# Altium PCB T35_V2.1.PcbDoc (part 3 of 5)
Units mil, origin at the board's own origin, x right, y up, seen from the top; angles counter-clockwise.
Board outline 2372.44 x 1023.62 mil, 12 copper layers (TOP, L2-G, L3, L4-G, L5, L6-V, L7-V, L8, L9-G, L10, L11-G, BOTTOM), stack 62.192 mil thick; 356 components, 288 nets, 1478 pads, 832 vias.
Unrouted connection lines stored in the file: 19.
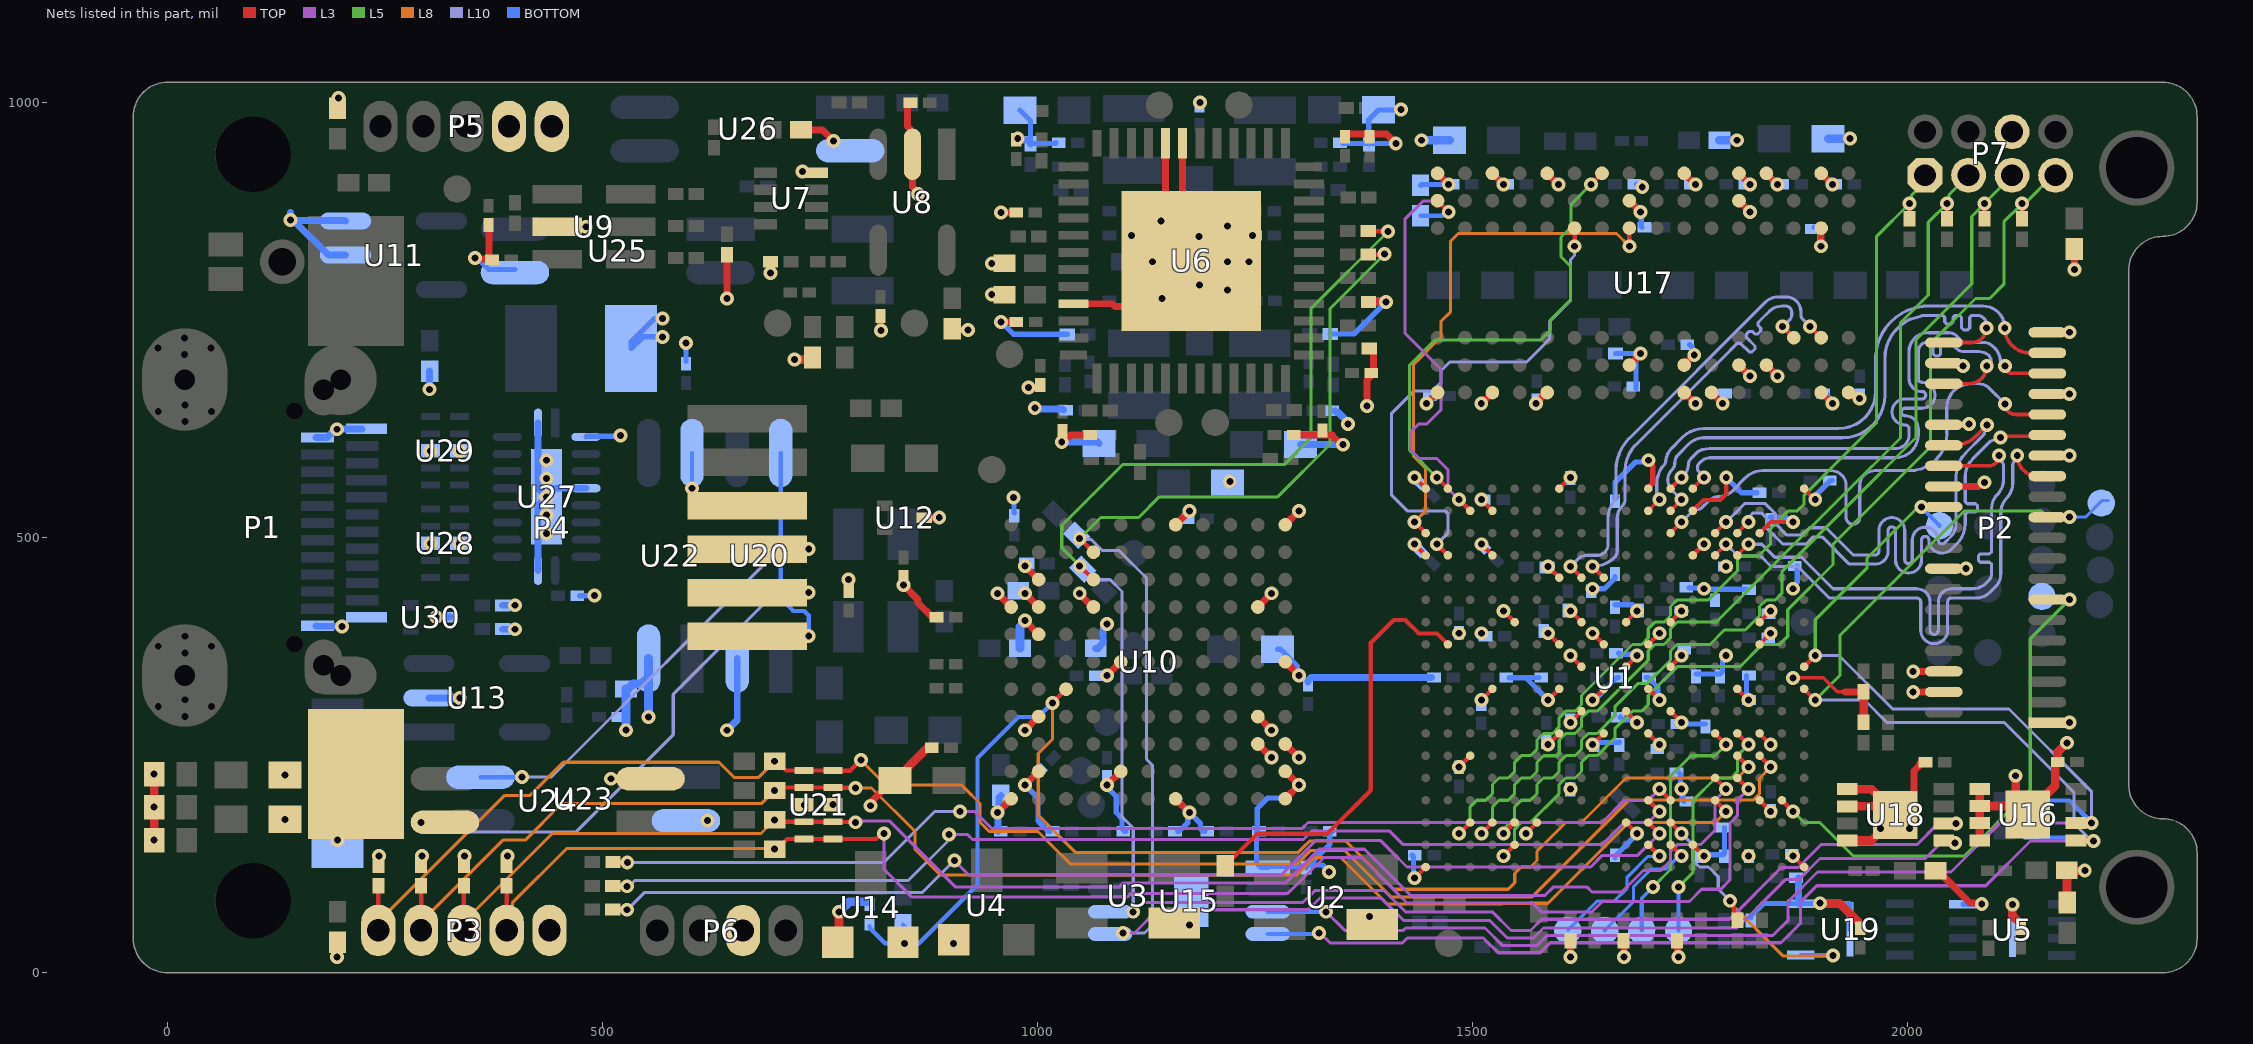
[diagram p13: the nets of this part, all layers, seen from the top]

## Via types
v1: diameter 16, hole 8, TOP to BOTTOM, tented both sides, 832 vias

## Nets (pads, with @x,y where several pads share a name; then routed paths per layer and width w, separated by ;. In a path a pad name is that pad's centre, name@x,y a point inside that pad or via, vN(x,y) a via of type N, cw(c..) or ccw(c..) an arc to the next point about the centre after c; other vN are vias at no path point) (continued)
DDR_DQS1_N: U1.L5 U17.B7 | length 523
  TOP w5: v1(1612.66,467.02) U1.L5@1625.46,454.23 ; v1(1888.18,742.81) U17.B7@1900.98,730.02
  L10 w3.6: v1(1612.66,467.02) 1621.14,475.5 cw(c1632,464.64) 1632,480 1644.76,480 ccw(c1644.76,490.24) 1652,483 ccw(c1642.43,492.57) 1655.97,492.57 1655.97,522.48 cw(c1686.49,522.48) 1663.32,542.35 ; 1658.61,534.91 ccw(c1655.48,536.7) 1658.75,535.17 cw(c1686.68,522.4) 1663.21,542.22 ccw(c1660.45,544.52) 1663.32,542.35 ; 1680.01,614.01 ccw(c1716.32,577.74) 1665,577.74 1665,550.34 cw(c1643.19,550.34) 1663.85,543.36 cw(c1660.45,544.52) 1663.32,542.35 ; 1680.03,614.03 1836.79,770.79 cw(c1851.63,755.95) 1851.63,776.94 1860.32,776.94 cw(c1860.32,759.53) 1877.73,759.53 1877.73,755.95 ccw(c1884.23,755.95) 1879.63,751.37 v1(1888.18,742.81)
DDR_DQS1_P: U1.K5 U17.C7 | length 514.2
  TOP w5: v1(1638.25,467.02) U1.K5@1651.05,454.23 ; v1(1856.68,742.81) U17.C7@1869.48,730.02
  L10 w3.6: v1(1638.25,467.02) ccw(c1638.25,502.69) 1663.42,477.42 ccw(c1638.25,502.69) 1663.47,477.47 ccw(c1656,484.94) 1666.57,484.94 1666.57,522.4 cw(c1686.68,522.4) 1672.46,536.63 1672.52,536.69 ccw(c1665.07,544.13) 1675.6,544.13 1675.6,577.74 cw(c1716.32,577.74) 1687.53,606.54 1795.73,714.74 1796.64,715.65 1804.7,723.71 1808.09,723.71 1818.13,713.67 1821.53,713.67 1824.92,717.06 1824.92,720.46 1814.88,730.5 1814.88,733.89 1818.28,737.28 1821.67,737.28 1824.71,734.25 1828.1,734.25 1831.49,737.64 1831.49,741.04 1828.46,744.07 1828.46,747.47 1831.88,750.89 1841.18,760.19 cw(c1856.02,745.35) 1856.02,766.34 1860.32,766.34 cw(c1860.32,759.53) 1867.13,759.53 1867.13,755.95 cw(c1860.63,755.95) 1865.23,751.36 v1(1856.68,742.81)
DDR_ODT: U1.U1 U17.K1 | length 552.3
  TOP w5: v1(1459.12,569.39) U1.U1@1471.91,556.59 ; v1(1636.21,906.2) U17.K1@1649.01,918.99
  L5 w3.5: v1(1459.12,569.39) 1428,600.5 1428,698.58 1456.84,727.43 1578.69,727.43 1589.38,738.11 1589.38,750 1612.66,773.28 1612.66,812.34 1602,823 1602,845.8 1613.56,857.36 1613.56,883.55 v1(1636.21,906.2)
DDR_R\A\S\: U1.V3 U17.J3 | length 605.9
  TOP w5: v1(1433.53,518.21) U1.V3@1446.32,505.41 ; v1(1680.5,835.13) U17.J3@1680.5,856
  L8 w3.5: v1(1433.53,518.21) 1446.28,530.96 1446.28,579.63 1432.49,593.42 1432.49,603.4 1432.49,699.49 1463.98,730.98 1463.98,748.92 1475,759.94 1475,811 ; 1474.78,811 1474.78,841 1483.66,849.88 1665.75,849.88 v1(1680.5,835.13)
DDR_REFCLK: R2.2 U1.U8 | length 484.7
  TOP w5: R2.2@1216,123 1216,125.5 1223.5,133 1226,133 1252.94,159.94 1333.56,159.94 1383.39,209.77 1383.39,379.44 1409.54,405.59 1422.94,405.59 1438.53,390 1459.37,390 U1.U8@1471.37,378
DDR_RST: R81.1 U1.T2 U17.T2 | length 529
  TOP w5: U17.T2@1460.03,887.5 v1(1472.83,874.7) ; v1(1484.71,543.8) U1.T2@1497.5,531
  L3 w3.5: v1(1472.83,874.7) 1460.53,887 1443.2,887 1422.44,866.24 1422.44,735.4 1463.98,693.86 1463.98,647.21 1447.76,630.99 1438.75,630.99 1429,621.24 1429,601.07 1438.84,591.23 1459.12,591.23 1471.87,578.48 1471.87,556.64 v1(1484.71,543.8)
  BOTTOM w5: R81.1@1440.37,870.2 1465.35,870.2 1469.85,874.7 v1(1472.83,874.7)
DDR_W\E\: U1.U4 U17.L3 | length 590.1
  TOP w5: v1(1459.12,492.61) U1.U4@1471.91,479.82 ; v1(1617.51,835.13) U17.L3@1617.51,856
  L10 w3.5: v1(1459.12,492.61) 1471.87,505.36 1471.87,527.91 1468.73,531.05 1425.14,531.05 1407.29,548.89 1407.29,643.15 1433.12,668.98 1454.15,668.98 1463.98,678.81 1463.98,691.83 1474.12,701.97 1562.37,701.97 1588.99,728.59 1588.99,748.7 1612.71,772.41 1612.71,819.66 1617.51,824.47 v1(1617.51,835.13)
FLASH_CS: R84.1 U1.G16 U19.1 | length 324.6
  TOP w5: U1.G16@1727.82,172.73 v1(1740.61,159.94) ; 1800.35,75.66 1800.35,64.88 R84.1@1804.74,60.49
  L8 w3.5: v1@1795.02,81.54 1857.46,19.11 1913.83,19.11 v1(1914.53,19.81)
  L10 w3.5: v1(1740.61,159.94) 1753.36,147.19 1753.36,129.16 1761.02,121.51 1771.49,121.51 1782.66,110.33 1782.66,96.32 v1(1796.23,82.75)
  BOTTOM w5: U19.1@1877.3,20.42 1877.61,20.12 1914.22,20.12 v1(1914.53,19.81)
FPGA_TCK: P7.1 R15.2 U1.T16 | length 1101.6
  TOP w5: v1(1484.71,159.94) U1.T16@1497.5,172.73 ; R15.2@2002.37,866.69 v1(2002.37,884.13)
  L5 w3.5: v1(1484.71,159.94) 1497.46,172.69 1497.46,190.72 1505.06,198.32 1515.53,198.32 1523.07,205.86 1523.07,216.33 1530.66,223.92 1541.14,223.92 1548.67,231.46 1548.67,241.93 1556.26,249.52 1566.73,249.52 1574.26,257.05 1574.26,267.52 1581.85,275.11 1592.32,275.11 1599.85,282.64 1599.85,293.11 1607.44,300.7 1617.91,300.7 1625.5,308.29 1625.5,318.76 1684.15,377.41 1694.62,377.41 1702.18,384.97 1702.18,395.44 1709.79,403.05 1720.26,403.05 1727.8,410.58 1727.8,421.06 1735.42,428.68 1771.49,428.68 1804.55,461.74 1804.55,474.41 1809.14,479 1828.98,479 1842.98,492.99 1842.98,510.65 1863.28,530.96 1873.51,530.96 1881.41,538.85 1881.41,549.08 1928.17,595.84 1964.82,632.49 1964.82,846.58 2002,883.77 v1@2002,884 ; v1(2002.37,884.13) 2004.76,886.53 2004.76,893.64 2022,910.87 P7.1@2022,922
FPGA_TDI: P7.3 R17.2 U1.R16 | length 1100.5
  TOP w5: v1(1510.3,159.94) U1.R16@1523.09,172.73 ; R17.2@2045.58,866.69 v1(2045.58,884.13)
  L5 w3.5: v1(1510.3,159.94) 1523.05,172.69 1523.05,190.72 1530.65,198.32 1541.13,198.32 1548.66,205.86 1548.66,216.33 1556.26,223.92 1566.73,223.92 1574.26,231.46 1574.26,241.93 1581.79,249.46 1597.82,249.46 1599.91,251.54 1599.91,267.58 1607.47,275.14 1617.94,275.14 1625.46,282.65 1625.46,293.13 1633.06,300.73 1643.53,300.73 1702.18,359.38 1702.18,369.85 1709.79,377.46 1720.26,377.46 1727.8,384.99 1727.8,395.47 1735.42,403.09 1780.46,403.09 1928.17,550.8 1992.08,614.71 1992.08,747.19 2024.04,779.15 2024.04,862.6 v1(2045.58,884.13) 2047.97,886.53 2047.97,894.37 P7.3@2070.4,916.8 ; P7.3@2061,919.35 P7.3@2061,929
FPGA_TDO: P7.7 R16.2 U1.P17 | length 1174.2
  TOP w5: v1(1535.89,134.35) U1.P17@1548.69,147.14 ; R16.2@2132,866.69 v1(2132,884.13)
  L5 w3.5: v1(1535.89,134.35) 1548.64,147.1 1548.64,165.13 1556.24,172.73 1566.72,172.73 1599.85,205.87 1599.85,216.34 1607.44,223.93 1617.91,223.93 1625.44,231.46 1625.44,241.93 1633.06,249.55 1643.53,249.55 1663.84,269.86 1663.84,280.33 1684.15,300.64 1694.62,300.64 1702.18,308.2 1702.18,318.67 1735.43,351.91 1807.64,351.91 1833.23,377.5 1853.2,377.5 1862.54,386.84 1862.54,417.37 1914.53,469.36 1914.53,492.53 1928.17,506.17 2026.4,604.4 2026.4,723 2078.4,775 2094.6,775 2111,791.4 2111,863.13 v1(2132,884.13) 2134.87,884.13 2167.53,916.8 P7.7@2170.4,916.8 ; P7.7@2159.6,927.6 P7.7@2161,929
FPGA_TMS: P7.5 R18.2 U1.P16 | length 1109.4
  TOP w5: v1(1535.89,159.94) U1.P16@1548.69,172.73 ; R18.2@2088.79,866.69 v1(2088.79,884.13)
  L5 w3.5: v1(1535.89,159.94) 1538.28,162.33 1538.28,167.28 1548.64,177.64 1548.64,190.72 1556.24,198.32 1566.72,198.32 1574.25,205.86 1574.25,216.33 1581.85,223.92 1592.32,223.92 1599.85,231.46 1599.85,241.93 1607.44,249.52 1617.91,249.52 1625.44,257.05 1625.44,267.52 1633.06,275.14 1643.53,275.14 1663.84,295.45 1663.84,305.92 1690.62,332.7 1701.09,332.7 1727.77,359.38 1727.77,369.85 1735.33,377.41 1773.1,377.41 1789.68,393.99 1813.56,393.99 1830.14,410.56 1830.14,421.03 1837.7,428.59 1848.17,428.59 1855.82,436.24 1855.82,461.02 1928.17,533.38 2010,615.21 2010,727.79 2074.04,791.83 2074.04,869.38 v1(2088.79,884.13) 2088.79,884.66 2120.4,916.27 P7.5@2120.4,916.8 ; P7.5@2109.6,927.6 P7.5@2111,929
FX3_RESET: C117.1 R68.2 U1.D13 U10.C5 U14.2 | length 1550.9
  TOP w5: v1(1017.17,310.25) U10.C5@1032.92,325.99 ; U1.D13@1804.59,249.5 v1(1817.39,236.71)
  L8 w3.5: v1(1017.17,310.25) 1017.17,268.17 1001,252 1001,180.99 1043.99,138 1299.41,138 1305,143.59 1305.15,143.59 1312.91,151.35 1354.49,151.35 1409.84,96.01 1541.17,96.01 1548.73,103.56 1548.73,114.04 1556.29,121.6 1566.76,121.6 1574.32,129.16 1574.32,139.63 1607.47,172.78 1625.5,172.78 1676.59,223.87 1804.55,223.87 v1(1817.39,236.71)
  BOTTOM w5: C117.1@807,53.72 807,51.75 825,33.75 v1(847.38,33.75) ; R68.2@845.57,55 847.38,53.19 v1(847.38,33.75) ; v1(1017.17,310.25) 1000.93,294 978.43,294 931.2,246.77 931.2,146.7 931.2,101.23 863.72,33.75 v1(847.38,33.75)
GND: C1.1 C2.2 C3.1 C4.2 C5.2 C6.2 C7.2 C8.2 C9.2 C10.2 C11.2 C12.2 C13.2 C14.2 C15.2 C16.2 C17.2 C18.2 C19.2 C20.2 C21.2 C22.2 C23.2 C24.2 C25.2 C26.2 C27.2 C28.2 C29.2 C30.2 C31.2 C32.2 C33.2 C34.2 C35.2 C36.2 C37.2 C38.2 C39.2 C40.2 C41.2 C42.2 C43.2 C44.2 C45.2 C46.2 C47.2 C48.2 C49.2 C50.2 C51.2 C52.2 C53.2 C54.2 C55.2 C56.2 C57.2 C58.2 C59.2 C60.2 C61.2 C62.2 C63.2 C64.2 C65.2 C66.2 C67.2 C68.1 C69.1 C70.1 C71.2 C72.2 C73.1 C74.1 C75.1 C76.1 C77.1 C78.2 C79.1 C82.2 C83.2 C84.2 C85.1 C86.2 C87.2 C90.2 C91.2 C92.2 C94.1 C95.2 C96.2 C99.1 C100.2 C102.2 C104.2 C105.2 C106.2 C107.2 C110.1 C112.1 C114.1 C115.1 C116.2 C117.2 C118.1 C119.2 C120.1 C121.2 C122.1 C123.1 C124.1 C125.1 C126.1 C127.1 C128.1 C129.1 C130.1 C131.1 C132.1 C133.1 C134.1 C135.1 C136.1 C137.1 C138.2 C139.2 C140.2 C141.2 C142.2 C143.2 C144.2 C145.2 C146.2 C147.2 C148.2 C149.2 C150.2 C151.2 C152.2 C153.2 C155.2 C156.2 C157.2 C158.1 C159.1 ECP1.2 FB6.1 LED1.2 LED2.2 LED3.2 P1.A1 P1.A12 P1.B1 P1.B12 P2.1 P2.4 P2.6 P2.16 P2.24 P2.27 P2.30 P2.33 P2.36 P2.39 P3.5 P4.0 P5.1 P5.2 P6.2 P7.6 R19.1 R20.1 R21.1 R22.1 R23.1 R24.1 R33.2 R36.2 R40.2 R44.2 R46.2 R55.1 R56.1 R57.1 R58.2 R61.2 R62.2 R64.1 R65.1 R75.2 R80.1 R81.2 R82.2 R83.2 R86.1 R87.1 R88.2 R96.1 R97.1 R101.2 R102.2 R103.2 R104.2 U1.A1 U1.A18 U1.C3 U1.C7 U1.C8 U1.C12 U1.C15 U1.D10 U1.F2 U1.F4 U1.F17 U1.G7 U1.G9 U1.G11 U1.H1 U1.H8 U1.H10 U1.H12 U1.J7 U1.J9 U1.J11 U1.J16 U1.K8 U1.K10 U1.K12 U1.L7 U1.L9 U1.L11 U1.M1 U1.M5 U1.M8 U1.M10 U1.M12 U1.N16 U1.P7 U1.R2 U1.R4 U1.R10 U1.T13 U1.V1 U1.V4 U1.V18 U2.2 U3.2 U4.1 U5.4 U5.9 U6.7 U6.8 U6.21 U6.EP U7.8 U8.2 U9.2 U10.A1 U10.A8 U10.B2 U10.B4 U10.B7 U10.B8 U10.B9 U10.D8 U10.E2 U10.E6 U10.G1 U10.G11 U10.K3 U10.K4 U10.K8 U10.L1 U10.L2 U10.L3 U10.L6 U10.L11 U11.2 U11.3 U12.3 U13.2 U14.1 U15.1 U15.SS U16.1 U16.2 U16.3 U16.4 U16.9 U17.A9 U17.B1 U17.B3 U17.B9 U17.D1 U17.D8 U17.E1 U17.E2 U17.E8 U17.F9 U17.G1 U17.G8 U17.G9 U17.J2 U17.J8 U17.M1 U17.M9 U17.P1 U17.P9 U17.T1 U17.T9 U18.1 U18.2 U18.4 U18.9 U19.4 U19.9 U20.2 U21.9 U21.10 U22.2 U23.2 U24.2 U25.3 U26.2 U27.2 U27.5 U27.11 U27.20 U27.21 U28.9 U28.10 U29.9 U29.10 U30.3 | length 8168.6
  TOP w4: v1(1868.57,339.07) 1903.16,339.07 1919.39,322.83 1928.17,322.83
  TOP w5: v1(1433.53,108.76) U1.V18@1446.32,121.55 ; v1(1433.53,492.61) U1.V4@1446.32,479.82 ; v1(1433.53,569.39) U1.V1@1446.32,556.59 ; v1(1484.71,236.71) U1.T13@1497.5,249.5 ; v1(1510.3,313.48) U1.R10@1523.09,326.28 ; v1(1510.3,492.61) U1.R4@1523.09,479.82 ; v1(1510.3,543.8) U1.R2@1523.09,531 ; v1(1535.89,415.84) U1.P7@1548.69,403.05 ; v1(1561.48,159.94) U1.N16@1574.28,172.73 ; v1(1587.07,262.3) U1.M12@1599.87,275.09 ; v1(1587.07,313.48) U1.M10@1599.87,326.28 ; v1(1587.07,390.25) U1.M8@1599.87,377.46 ; v1(1587.07,467.02) U1.M5@1599.87,454.23 ; U1.M1@1599.87,556.59 v1(1612.66,569.39) ; v1(1612.66,287.89) U1.L11@1625.46,300.69 ; v1(1612.66,364.66) U1.L9@1625.46,351.87 ; v1(1612.66,415.84) U1.L7@1625.46,403.05 ; v1(1638.25,262.3) U1.K12@1651.05,275.09 ; v1(1638.25,313.48) U1.K10@1651.05,326.28 ; v1(1638.25,390.25) U1.K8@1651.05,377.46 ; U1.J16@1676.64,172.73 v1(1689.43,159.94) ; U1.J11@1676.64,300.69 v1(1689.43,287.89) ; U1.J9@1676.64,351.87 v1(1689.43,364.66) ; U1.J7@1676.64,403.05 v1(1689.43,415.84) ; U1.H12@1702.23,275.09 v1(1715.02,262.3) ; U1.H10@1702.23,326.28 v1(1715.02,313.48) ; U1.H8@1702.23,377.46 v1(1715.02,390.25) ; U1.G11@1727.82,300.69 v1(1740.61,287.89) ; U1.G9@1727.82,351.87 v1(1740.61,364.66) ; U1.G7@1727.82,403.05 v1(1740.61,415.84) ; U1.F17@1753.41,147.14 v1(1766.21,134.35) ; U1.F4@1753.41,479.82 v1(1766.21,492.61) ; U1.F2@1753.53,531 U1.F2@1753.41,531 1765.83,543.42 1784.85,543.42 1791.86,550.43 v1(1791.86,569.39) ; U1.D10@1804.59,326.28 v1(1817.39,313.48) ; U1.C15@1830.18,198.32 v1(1842.98,185.53) ; U1.C12@1830.18,275.09 v1(1842.98,262.3) ; U1.C8@1830.18,377.46 v1(1842.98,390.25) ; U1.C7@1830.18,403.05 v1(1842.98,415.84) ; U1.C3@1830.18,505.41 1842.98,518.21 v1(1868.57,518.21) ; v1(1868.57,134.35) U1.A18@1881.36,121.55 ; U1.A1@1881.36,556.59 v1(1894.16,543.79)
  TOP w6: U1.H1@1702.23,556.59 1702.23,557.63 1707.48,562.88 1707.48,582.68 1702.27,587.88 v1(1702.27,589.13)
  TOP w8: v1(195,18) 195.25,18.25 195.25,34.86 R97.1@195.5,35.11 ; R96.1@195.5,993.77 195.5,1004.62 v1(196.5,1005.62) ; R104.2@242.36,123.81 242.79,124.24 242.79,133.92 v1(243.21,134.35) ; R103.2@291.57,123.81 292,124.24 292,133.92 v1(292.42,134.35) ; R102.2@340.79,123.81 341.21,124.24 341.21,133.92 v1(341.64,134.35) ; v1(353.41,821.57) 354.41,820.57 369.01,820.57 369.55,820.03 369.55,856.1 C104.2@369.08,856.57 ; R101.2@390,123.81 390.42,124.24 390.42,133.92 v1(390.85,134.35) ; P5.2@392.64,961.84 P5.2@392.64,973 ; U9.2@447.95,857.57 v1(481.34,857.57) ; v1(643,775) R55.1@643,825.19 ; v1(693.19,804.6) R56.1@693.19,817.31 ; C32.2@728.19,969 752.78,969 v1(765.51,956.27) ; U21.9@731.78,193.21 v1(731.99,193) ; C118.1@783,441.43 v1(783,451.98) ; v1(808,192) 808,195.75 833.25,221 C124.1@836.5,221 ; C102.2@819.71,752.02 819.92,751.81 819.92,738.63 v1(820.13,738.42) ; C121.2@845.57,458.14 845.83,457.88 845.83,445.95 v1(846.09,445.69) 863,428.78 863,424.86 879.2,408.66 C123.1@881.17,408.66 ; C29.2@851.2,1000.18 850.49,999.47 850.49,973 854.17,969.32 854.17,943.13 U8.2@856.41,940.9 856.41,903.38 863,896.79 v1(863,895) ; U12.3@870.02,523.12 v1(887.17,523.12) ; C106.2@902.04,740.34 903.75,738.63 v1(920.48,738.63) ; v1(947.56,779.45) C67.2@962.12,779.45 ; v1(947.56,815.45) C71.2@962.12,815.45 ; v1(954.18,184.26) U10.A1@969.93,200.01 ; v1(954.18,436.23) U10.A8@969.93,420.48 ; v1(958.05,874) C87.2@972.61,874 ; v1(958.34,748.15) C73.1@972.91,748.15 ; v1(985.68,215.76) U10.B2@1001.42,231.51 ; v1(985.68,278.75) U10.B4@1001.42,294.5 ; v1(985.68,404.73) U10.B7@1001.42,388.99 cw(c1001.42,392.39) U10.B7@999.02,389.98 ; v1(985.68,436.23) U10.B8@1001.42,420.48 ; v1(985.68,467.73) U10.B9@1001.42,451.98 ; v1(990,673) 1002.84,673 C76.1@1003.2,672.64 ; v1(1028,610) 1029.78,610 1037.94,618.15 C90.2@1057.81,618.15 ; U6.21@1041.61,769.02 1085.98,769.02 1089.22,765.79 1124.4,765.79 U6.EP@1176.85,818.24 U6.EP@1167.01,828.08 ; v1@1048,436 1062.88,421.12 ccw(c1064.42,422.65) U10.D8@1064.42,420.48 ; v1(1080.16,215.76) U10.E2@1095.91,231.51 ; v1(1080.16,341.74) 1092.89,354.47 cw(c1099,348.36) U10.E6@1099,357 ; U6.8@1147.32,953.47 1147.32,847.76 U6.EP@1167.01,828.08 ; U10.G1@1158.9,200.01 v1(1174.65,184.26) ; U10.G11@1158.9,514.97 v1(1174.65,530.72) ; U6.7@1167.01,953.47 U6.EP@1167.01,828.08 ; U10.K3@1253.39,263 v1(1269.14,247.25) ; U10.K4@1253.39,294.5 v1(1269.14,278.75) ; U10.K8@1253.39,420.48 v1(1269.14,436.23) ; U10.L1@1284.89,200.01 v1(1300.64,215.76) U10.L2@1284.89,231.51 ; U10.L3@1284.89,263 v1(1300.64,247.25) ; U10.L6@1284.89,357.49 v1(1300.64,341.74) ; U10.L11@1284.89,514.97 v1(1300.64,530.72) ; C92.2@1295.61,618.15 1339.13,618.15 ; 1338.13,618.15 1349.28,607 v1(1351.45,607) ; C83.2@1353.61,964.06 1401.37,964.06 v1(1411.97,953.47) ; v1(1378.81,651.7) 1378.81,681.65 1382.74,685.57 1382.74,687.54 1384.65,689.45 1386.61,689.45 1386.61,712.26 1386.28,712.59 1386.28,714.56 1383.39,717.45 R33.2@1381.43,717.45 ; v1(1447.24,654.23) U17.T9@1460.03,667.02 ; U17.T1@1460.03,918.99 v1(1472.83,906.2) ; v1(1510.23,654.23) U17.P9@1523.02,667.02 ; U17.P1@1523.02,918.99 v1(1535.82,906.2) ; v1(1573.22,654.23) U17.M9@1586.02,667.02 ; U17.M1@1586.02,918.99 v1(1598.81,906.2) ; v1(1612.71,18) R23.1@1612.71,36.87 ; R22.1@1674.02,36.87 1674.12,36.76 1674.12,18.1 v1(1674.22,18) ; U17.J8@1680.5,698.52 1680.5,698.78 1693.3,711.58 v1(1693.3,711.84) ; U17.J2@1680.5,887.5 v1(1693.3,874.7) ; R20.1@1735.33,36.87 1736.06,36.14 1736.06,18.73 v1(1736.79,18) ; U17.G9@1743.5,667.02 v1(1756.29,654.23) ; U17.G1@1743.5,918.99 v1(1756.29,906.2) ; U17.G8@1743.5,698.52 v1@1755.03,710.01 ; U17.F9@1774.99,667.02 v1(1787.79,654.23) ; U17.E8@1806.49,698.52 v1(1819.28,685.72) ; U17.E2@1806.49,887.5 v1(1819.28,874.7) ; U17.E1@1806.49,918.99 v1(1819.28,906.2) ; U17.D8@1837.98,698.52 v1(1850.78,685.72) ; U17.D1@1837.98,918.99 v1(1850.78,906.2) ; U17.B9@1900.98,667.02 v1(1913.77,654.23) ; v1(1900.98,835.12) U17.B3@1900.98,856 ; U17.B1@1900.98,918.99 v1(1913.77,906.2) ; 1928.17,322.83 R19.1@1949.85,322.83 ; U17.A9@1932.47,667.02 1934.57,667.02 1939.72,661.87 1943.74,661.87 v1(1945.27,660.34) ; U18.9@1986.31,181.56 2007.91,203.15 2007.91,231.91 2014.13,238.13 2014.13,240.09 2016.03,242 C158.1@2018,242 ; v1(2006.78,322.76) 2006.82,322.8 v1@2007.8,322.8 ; v1(2006.78,346.38) 2006.82,346.42 P2.6@2041.92,346.46 ; v1@2007,322 v1@2007.8,322.8 ; R88.2@2032.44,117.37 2034.94,117.37 2071.92,80.39 2084.05,80.39 v1(2085.58,78.86) ; P2.4@2041.92,322.83 P2.4@2041.92,322.83 v1@2007.8,322.8 ; P2.24@2041.92,559.06 2081.86,559.06 2086.62,563.82 v1(2088.79,563.82) ; P2.30@2041.92,629.92 2042.46,630.46 2070.26,630.46 v1(2070.8,630.99) ; P2.36@2041.92,700.79 2058.7,700.79 2062.04,697.45 v1(2063.99,697.45) ; P2.16@2041.92,464.57 v1@2067.53,464.59 ; P2.1@2161,287.4 P2.1@2161,287.4 2186.62,287.44 v1(2186.66,287.47) ; P2.27@2161,594.49 2186.59,594.49 v1(2186.66,594.56) ; P2.33@2161,665.35 P2.33@2161,665.35 2186.62,665.39 v1(2186.66,665.43) ; P2.39@2161,736.22 P2.39@2161,736.22 2186.62,736.26 v1(2186.66,736.29) ; v1(2192,808.39) R86.1@2192,832 ; P2.6@2041.92,346.46 P2.6@2041.92,346.46
  TOP w10: v1(-15.35,152.46) v1(-15.35,190.41) v1(-15.35,228.35) ; v1(509.84,223) U24.2@555.28,223 ; v1(721,705) 739.13,705 C105.2@741.47,707.34 ; v1(730,921) 730.69,920.31 745.25,920.31 U7.8@745.94,919.62 ; U14.1@770.57,35.04 772,36.47 v1(772,70.11) ; C124.1@842,220 850.49,228.49 850.49,235.49 873.75,258.75 C125.1@875.72,258.75 ; v1(903.49,33.75) 903.49,37.58 U4.1@903.71,37.8 ; R24.1@1381.04,771.6 v1@1400.17,771.6 ; v1(1899.49,79.95) 1899.87,79.57 1922.49,79.57 1946,56.05 C31.2@1946,54.09 ; U18.4@1931,152.03 1958.76,152.03 1986.31,179.59 U18.9@1986.31,181.56 ; U18.2@1931,191.4 1976.47,191.4 U18.9@1986.31,181.56 ; U18.1@1931,211.09 1958.76,211.09 1986.31,183.53 U18.9@1986.31,181.56 ; R21.1@1949.85,288 R19.1@1949.85,322.83 ; U16.4@2083.3,152.3 U16.3@2083.3,171.98 U16.2@2083.3,191.67 ; U16.1@2083.3,211.35 U16.2@2083.3,191.67 ; v1(2120.78,78.56) 2120.78,65.84 2130.56,56.05 C157.2@2130.56,54.09 ; v1(2124.57,226.48) 2124.57,195.86 U16.9@2128.77,191.67 ; R75.2@2183.37,117.64 R75.2@2183.51,117.49 ; v1(2183.51,264.38) 2172.8,253.66 2172.8,243.17 2171.89,242.27 2169.93,242.27 2169.93,215.11 2138.61,183.79 U16.9@2138.61,181.83 U16.9@2128.77,191.67 ; R87.1@2183.66,80.79 2183.51,80.93 R75.2@2183.51,117.49 ; v1(2204,117.37) 2183.64,117.37 R75.2@2183.51,117.49 ; U16.2@2083.3,191.67 U16.9@2128.77,191.67
  BOTTOM w6: v1(353.41,821.57) 356.11,821.57 369.38,808.3 U25.3@399.49,808.3 ; C112.1@473.96,433.44 v1(491.03,433.44) ; U27.2@481.12,616.03 481.78,616.69 519.93,616.69 v1(521,617.76) ; ECP1.2@533,717.45 546.55,731 v1(569,731) ; ECP1.2@533,720.45 533,725.02 560,752.02 v1(569,752.02) ; C159.1@596.06,702.94 v1(596.06,723.75) ; v1(958.34,748.15) 972.6,733.89 R44.2@1034.48,733.89 ; v1(972.6,546.46) 973.02,546.03 973.02,528.82 C137.1@973.44,528.4 ; C86.2@979.97,991.43 992,979.4 R40.2@992,954.35 ; R40.2@992,952.76 992.62,953.38 1020.86,953.38 C85.1@1021.48,954 ; C136.1@1003.2,232.17 1002.64,232.17 986.23,215.76 v1(985.68,215.76) 1000.68,200.76 1000.68,174.3 1012.38,162.6 C3.1@1014.35,162.6 ; v1(1080.16,215.76) 1080.16,213.05 1090.56,202.65 1090.56,184.15 1097.2,177.51 1097.2,165.51 1100.11,162.6 C4.2@1101.69,162.6 ; C129.1@1161.04,162.6 1163,162.6 1172.74,172.33 1172.74,182.35 v1(1174.65,184.26) 1187.51,171.41 1187.51,165.51 1190.41,162.6 C135.1@1192.38,162.6 ; C132.1@1276,372 1279.25,372 1298.72,352.53 1298.72,343.66 v1(1300.64,341.74) ; v1(1300.64,215.76) 1285.64,200.76 1264.42,200.76 1252.64,188.98 1252.64,163.52 1251.73,162.6 1251.73,126.16 1256.6,121.29 U15.1@1264.77,121.29 1265.99,122.5 1307.93,122.5 1309.15,123.72 C119.2@1310.13,123.72 ; C119.2@1309.15,120.77 1309.15,122.74 C119.2@1310.13,123.72 ; v1@1331.85,119.43 1327.56,123.72 C119.2@1310.13,123.72 ; C1.1@1336,161 1336,147.62 1314.02,125.64 1312.05,125.64 C119.2@1310.13,123.72 ; R46.2@1336.53,734.29 1363.76,734.29 v1(1400.61,771.15) ; C1.1@1337.1,162.6 C1.1@1339.07,162.6 ; C77.1@1350.85,954 1351.45,953.41 1380.41,953.41 R36.2@1381,952.81 ; v1(1411.97,953.47) 1411.64,953.14 1381.33,953.14 R36.2@1381,952.81 ; v1(1418,992.43) 1417.48,991.92 C78.2@1392,991.92 1381,980.92 R36.2@1381,952.81 ; C47.2@1431,135 1432.26,133.74 1432.26,110.02 v1(1433.53,108.76) ; R81.2@1440.37,905.2 cw(c1442.78,902.78) 1442.78,906.2 v1(1472.83,906.2) ; C54.2@1542,339.28 1542.11,339.18 1561.37,339.18 ; C9.2@1576.4,339.28 1561.48,339.28 1561.37,339.18 ; v1(1587.07,313.48) 1561.37,339.18 ; v1(1612.66,569.39) C39.2@1615.07,571.8 ; v1(1638.25,262.3) 1640.74,264.78 1668.92,264.78 C62.2@1669,264.86 ; v1(1638.25,313.48) 1640.23,313.48 1666.03,339.28 C16.2@1668,339.28 ; v1(1638.25,441.43) 1651.97,441.43 1664,453.47 1664,455.43 C38.2@1663.92,455.36 ; C14.2@1663.92,423.08 1664,423 1683.84,423 1689.43,417.4 v1(1689.43,415.84) ; C55.2@1664,132 1664,133.97 1689.43,159.4 v1(1689.43,159.94) ; R82.2@1664.52,712 1664.6,711.92 1693.22,711.92 v1(1693.3,711.84) 1693.3,711.44 1688.05,706.2 C139.2@1688.05,670.91 ; C24.2@1665.93,546.9 1664,544.97 1664,563.75 1687.46,587.22 1700.36,587.22 v1(1702.27,589.13) ; C18.2@1668,367.4 1669.37,366.03 1688.06,366.03 v1(1689.43,364.66) ; C10.2@1670,293.76 1672.91,290.86 1683.76,290.86 1686.73,287.89 v1(1689.43,287.89) ; C142.2@1689,906.45 1694.98,906.45 v1@1697.28,904.15 ; v1(1693.3,874.7) 1694.15,873.85 1694.15,857.85 C140.2@1695,857 ; C6.2@1700,339.28 1701.97,339.28 1713.11,328.14 1713.11,315.39 v1(1715.02,313.48) ; C64.2@1737.61,230 1739.11,228.5 1739.11,212.62 v1(1740.61,211.12) 1741.81,209.92 1741.81,198.08 C58.2@1743,196.89 ; v1(1740.61,287.89) 1742.5,286 C30.2@1768.12,286 ; C56.2@1749,443 1749.78,442.22 1765.42,442.22 v1(1766.21,441.43) 1766.71,440.93 1814.48,440.93 C20.2@1814.98,440.43 ; C152.2@1750,722 1750.26,722 1753.16,719.09 1753.16,711.92 v1(1755.08,710.01) ; C8.2@1757,343.48 1784.8,343.48 1787.7,346.39 1787.7,357.86 1791.8,361.96 v1(1791.8,364.66) ; v1(1766.21,134.35) 1767.41,135.55 1788.4,135.55 1789.8,136.95 1789.8,166.8 C51.2@1790,167 ; v1(1791.86,569.39) 1809.42,551.83 C22.2@1827.05,551.83 ; C57.2@1814.98,341.74 1814.98,315.89 v1(1817.39,313.48) ; C65.2@1820,63 1820,64.97 1834.51,79.48 1875.32,79.48 U19.4@1877.3,79.48 1877.53,79.71 1899.25,79.71 v1(1899.49,79.95) v1@1900.99,78.45 ; C27.2@1842.98,523.61 1860.45,523.61 1865.86,518.21 v1(1868.57,518.21) ; v1(1868.57,441.43) 1868.57,444.14 1873.58,449.16 C23.2@1873.58,467.61 ; C148.2@1893,857 1894.97,857 1897.87,854.09 1897.87,852.13 1899.06,850.94 1899.06,837.04 v1(1900.98,835.12) ; v1(1894.16,543.79) 1896.07,545.71 1896.07,550.18 1911.8,565.91 C21.2@1913.77,565.91 ; U19.9@1933.25,78.45 1934.19,77.51 U19.9@1934.19,49.95 ; U5.4@2063.86,78.86 v1(2085.58,78.86)
  BOTTOM w8: 141.3,873.8 v1(141.3,865.53) 141.9,864.92 v1@145.1,864.92 ; P1.B12@170.69,398.82 171.17,398.33 200.19,398.33 v1(200.67,397.85) ; P1.B1@170.69,615.35 P1.B1@172.49,615.35 183.48,615.35 192.91,624.78 v1(195,624.78) 195.21,624.99 223.46,624.99 P1.A12@223.67,625.2 ; U11.2@204.76,824.94 185.08,824.94 v1@145.1,864.92 ; U11.3@204.76,864.31 204.16,864.92 v1@145.1,864.92 ; U13.2@300.51,315.98 v1@335.99,315.99 ; v1(301.44,670.73) C110.1@301.44,691.58 ; v1(309,409) 309.17,408.83 324.74,408.83 U30.3@324.91,408.66 ; R65.1@385.26,394.88 v1(399.49,394.88) ; R64.1@385.26,422.44 v1(399.49,422.44) ; U27.11@426,462.48 426,537.29 v1(435.84,547.13) ; U27.20@426,631.78 426,556.97 v1(435.84,547.13) ; U27.5@481.12,556.97 445.69,556.97 v1(435.84,547.13) ; v1(643,278.75) 655,290.75 U20.2@655,361.24 ; C128.1@955,162.6 954.59,163.01 954.59,183.85 v1(954.18,184.26) 955.71,185.79 955.71,201.57 R61.2@958.05,203.91 ; v1(977.43,958.77) 978.96,957.24 989.11,957.24 992,954.35 R40.2@992,952.76 ; v1(997,649) 998.17,647.83 1029.08,647.83 C94.1@1030.25,646.67 ; v1@1035,610 1069.44,610 C95.2@1071.04,608.4 ; C126.1@1067,373 1069.5,373 1075.5,379 1075.5,395.03 1080.16,399.69 v1(1080.16,401.11) ; C100.2@1302.29,607.27 1302.56,607 v1(1351.45,607) ; C134.1@1311.07,334 1311.07,335.97 1314.39,339.28 C46.2@1453,339.28 ; C99.1@1342,646 1343.91,644.09 1345.87,644.09 1357,632.97 v1(1357,631) ; v1(1447.24,654.23) v1@1448.77,655.76 ; v1(1756.29,654.23) v1@1757.82,655.76 ; C63.2@1874.98,109.2 1874.98,79.82 1875.32,79.48 U19.4@1876.4,78.4 ; v1@1900.99,78.45 U19.9@1933.25,78.45 ; C145.2@1903.02,666 1904.99,666 1906.9,664.09 1906.9,662.91 1914.81,655 v1@1915,655 ; v1@1912.24,655.76 v1(1913.77,654.23)
  BOTTOM w10: v1@527,278.75 C116.2@527,326.24 529.5,326.24 535.37,332.11 545.12,332.11 U22.2@552.98,339.97 ; v1@527.05,278.75 v1(527.1,278.8) ; v1(552.98,294.22) U22.2@552.98,339.97 ; U22.2@552.98,361.24 U22.2@552.98,339.97 ; v1(772,70.11) 783.61,81.72 C117.2@807,81.72 ; C122.1@979.97,373 979.97,397.41 987.56,405 v1@988,405 ; v1(1441.62,957) C146.2@1473.82,957 ; R80.1@1784,957 v1(1804,957) ; C147.2@1909,958.77 v1(1934.19,958.77)
  other v1: 1174.65,55 1381.78,64.49 1335.21,116.02 1817.39,134.35 195.5,152.46 1969.36,166 2002.37,166 621,174.86 135,176.34 765.24,193.21 1612.66,211.12 135,227.34 336,316 1484.71,390.25 1510.3,390.25 1048.67,436.23 2067.55,464.6 1791.8,467.02 302.27,493.63 335.73,493.63 435.84,505.13 435.84,526.13 1221.15,564.72 435.84,568.13 435.84,589.13 302.27,600 335.73,600 1143,775 1218.35,785 1186.34,790.45 1132.37,817.31 1218.35,817.31 1243.27,817.31 1185.86,846.21 1108,847.45 1247.14,847.45 1218.35,858.3 1142.35,864.31 1695.28,903.15 1186.69,1000.18
GPIO1_IO: P3.1 R89.2 R104.1 U1.C13 U21.1 U21.8 | length 1944.3
  TOP w5: P3.1@242.36,48.74 R104.1@242.36,100.19 ; v1(698,243.15) 700.5,243.15 711.07,232.58 U21.1@731.78,232.58 U21.8@765.24,232.58 765.51,232.31 784.7,232.31 v1(797,244.61) ; U1.C13@1830.18,249.5 v1(1842.98,236.71)
  L8 w3.5: P3.1@242.36,48.74 242.36,58.58 387.78,204 417,204 455,242 634.02,242 651.79,224.23 679.08,224.23 v1(698,243.15) ; v1(797,244.61) 825.85,215.76 912.93,215.76 916.62,212.06 934,194.68 934,172.92 944.62,162.31 1000.69,162.31 1016.3,146.7 1038.2,124.8 1298.38,124.8 1314.37,140.79 1353.04,140.79 1406.5,87.33 1406.8,87.33 1568.73,87.33 1679.75,198.35 1822.65,198.35 1830.23,205.93 1830.23,223.96 v1(1842.98,236.71)
GPIO2_IO: P3.2 R90.2 R103.1 U1.E15 U21.2 U21.7 | length 1772.3
  TOP w5: P3.2@291.57,48.74 R103.1@291.57,100.19 ; v1(698,209.48) 701.41,212.89 U21.2@731.78,212.89 U21.7@765.24,212.89 765.51,212.63 790.51,212.63 v1(790.78,212.36) ; U1.E15@1779,198.32 v1(1791.8,185.53)
  L8 w3.5: P3.2@291.57,48.74 291.57,58.58 385.46,152.46 411.15,152.46 453.42,194.73 683.25,194.73 v1(698,209.48) ; v1(790.78,212.36) 809.39,212.36 859.44,162.31 859.44,141.76 888.95,112.25 1297.85,112.25 1317.89,132.29 1349.04,132.29 1402.5,78.83 1534.33,78.83 1534.33,79.48 1586.48,79.48 1589.02,82.02 1679.78,172.78 1779.05,172.78 v1(1791.8,185.53)
GPIO3_IO: P3.3 R91.2 R102.1 U1.E14 U21.3 U21.6 | length 1733.8
  TOP w5: P3.3@340.79,48.74 R102.1@340.79,100.19 ; v1(698,175.81) 700.29,173.52 U21.3@731.78,173.52 U21.6@765.24,173.52 765.51,173.26 790.51,173.26 v1(790.78,172.99) ; U1.E14@1779,223.91 v1(1791.8,211.12)
  L3 w3.5: v1(790.78,172.99) 792.47,174.69 829.82,174.69 906.08,98.43 1094,98.43 1098.64,103.07 1285.07,103.07 1324,142 1376,142 1406.8,111.2 1429,89 1583.57,89 1593,98.43 1632.04,98.43 1637.54,92.93 1671.66,92.93 1696.1,117.37 1716.08,117.37 1727.86,129.16 1727.86,139.63 1735.42,147.19 1762.24,147.19 1778.96,163.9 1778.96,198.28 v1(1791.8,211.12)
  L8 w3.5: P3.3@340.79,48.74 340.79,58.58 442.31,160.11 682.29,160.11 v1(698,175.81)
GPIO4_IO: P3.4 R92.2 R101.1 U1.D14 U21.4 U21.5 | length 1764.4
  TOP w5: P3.4@390,48.74 R101.1@390,100.19 ; v1(698,142.15) 700.5,142.15 712.19,153.84 U21.4@731.78,153.84 U21.5@765.24,153.84 814.63,153.84 820.73,159.94 v1(823.71,159.94) ; U1.D14@1804.59,223.91 v1(1817.39,211.12)
  L3 w3.5: v1(823.71,159.94) 823.71,118.96 855.67,87 1103.75,87 1108,91.25 1288.05,91.25 1329.4,132.6 1372.62,132.6 1406.8,98.43 1423.2,82.02 1425.27,79.95 1569.27,79.95 1579.22,70 1622.78,70 1622.89,70.11 1637.55,70.11 1649.46,82.02 1749.53,82.02 1763.51,96.01 1785.56,96.01 1796.23,106.67 1796.23,171.93 1804.64,180.34 1804.64,198.37 v1(1817.39,211.12)
  L8 w3.5: P3.4@390,48.74 396.42,55.16 396.42,80.42 458.61,142.61 697.53,142.61 v1(698,142.15)
GPIO5: T2.1 U1.D12 | length 275.7
  TOP w5: U1.D12@1804.59,275.09 v1(1817.39,262.3)
  L5 w3.5: v1(1736.79,98.43) 1753.41,115.04 1753.41,197.83 1779.54,223.96 1797.6,223.96 1804.64,231 1804.64,249.55 v1(1817.39,262.3)
  BOTTOM w5: v1(1736.79,98.43) 1737,98.22 T2.1@1737,48.72
GPIO6: T3.1 U1.E12 | length 288.1
  TOP w5: U1.E12@1779,275.09 v1(1791.8,262.3)
  L5 w3.5: v1(1707.48,98.43) 1727.86,118.81 1727.86,225.89 1751.44,249.46 1778.96,249.46 v1(1791.8,262.3)
  BOTTOM w3.5: 1694.72,82.02 1694.72,85.66 v1(1707.48,98.43)
  BOTTOM w5: T3.1@1694.58,48.72 1694.72,48.86 1694.72,82.02
GPIO7: T4.1 U1.G17 | length 152.1
  TOP w5: U1.G17@1727.82,147.14 v1(1740.61,134.35)
  BOTTOM w3.5: T4.1@1652.17,48.72 1685.47,82.02 1685.47,99.22 1705.38,119.14 1722.58,119.14 1737.79,134.35 v1(1740.61,134.35)
GPIO8: T5.1 U1.H17 | length 166.2
  TOP w5: U1.H17@1702.23,147.14 v1(1715.02,134.35)
  BOTTOM w3.5: T5.1@1609.75,48.72 1643.78,82.75 1663.43,82.75 1677.92,97.24 1677.92,109.77 1701.77,133.63 1714.31,133.63 v1(1715.02,134.35)
Guider_DEC+: P4.4 U23.4 | length 556.8
  TOP w5: P4.4@666.41,486.81 666.6,487 v1(737.18,487)
  L10 w3.5: v1(407.56,225) 441.37,225 703.37,487 v1(737.18,487)
  BOTTOM w5: U23.4@359.78,224.86 359.85,224.93 407.49,224.93 v1(407.56,225)
Guider_DEC-: P4.5 U24.4 | length 662.2
  TOP w5: P4.5@666.41,436.81 666.58,436.98 v1(737.18,436.98)
  L10 w3.5: v1(291.57,172.73) 302.72,161.59 469.29,161.59 581.4,273.7 581.4,320 698.38,436.98 v1(737.18,436.98)
Guider_RA+: P4.3 U22.4 | length 116.4
  TOP w5: v1(602.98,556.97) 602.98,550.06 616.22,536.81 P4.3@666.41,536.81
  BOTTOM w5: v1(602.98,556.97) U22.4@602.98,597.52
Guider_RA-: P4.6 U20.4 | length 302
  TOP w5: P4.6@666.41,386.81 666.58,386.98 v1(737.18,386.98)
  BOTTOM w5: U20.4@705,597.52 705,430.39 719.55,415.84 731.99,415.84 737.18,410.66 v1(737.18,386.98)
I2CSCL: P2.22 R72.2 T24.1 U1.A9 U15.3 U16.6 | length 1804.5
  TOP w5: U1.A9@1881.36,351.87 v1(1894.16,364.66)
  L3 w3.5: v1(1331.85,70.11) 1353.16,48.8 1420.5,48.8 1423.2,51.5 1514.5,51.5 1534.5,31.5 1574.52,31.5 1586.02,43 1845.5,43 1863,60.5 1863,82 ; 1863.02,82.02 1896.8,115.8 1928.17,115.8 2050.29,115.8 2106.84,172.35 v1(2211.93,172.35)
  L5 w3.5: v1(1894.16,364.66) 1894.16,405.85 1953.8,465.49 1953.8,476.8 2008.44,531.44 2008.96,531.44 2012.88,535.36 v1(2016.26,535.36)
  L10 w3.5: v1(1894.16,364.66) 1921.58,364.66 1983.12,303.12 2116.88,303.12 2211.93,208.07 v1(2211.93,172.35)
  BOTTOM w5: U15.3@1264.77,70.11 v1(1331.85,70.11) ; v1@2017,536 2017,534.27 2037,514.27 T24.1@2037,513.92 ; v1@2018,536 v1@2019.08,537.08 ; R72.2@2146.29,198 2186.28,198 v1(2211.93,172.35)
I2CSCL_33: R29.2 R59.2 U10.D9 U15.6 U18.6 | length 2162
  TOP w5: v1(1048.67,467.73) U10.D9@1064.42,451.98 ; R29.2@1380.43,852.45 1402.55,852.45 v1(1403,852)
  L3 w3.5: v1(1110.17,70.11) 1120.98,80.92 1305.4,80.92 1318.83,94.35 1398.58,94.35 1400,92.93 1400.27,92.93 1423.2,70 1523,70 1544.5,48.5 1566.84,48.5 1579.84,61.5 1795.72,61.5 1855.24,121.02 1874.62,121.02 1900.79,147.19 2011.14,147.19 2035.67,171.72 v1(2055.74,171.72)
  L5 w3.5: v1(1048.67,467.73) 1028,488.39 1028,514.25 1097.89,584.14 1283.86,584.14 1314.39,614.66 1314.39,763.39 v1(1403,852)
  L10 w3.5: v1(1048.67,467.73) 1064.62,451.77 1083.67,451.77 1097.23,438.21 1097.23,179.24 1110.17,166.31 v1(1110.17,70.11)
I2CSDA: P2.21 R71.2 T26.1 U1.A10 U15.4 U16.5 | length 2013.9
  TOP w5: U1.A10@1881.36,326.28 v1(1894.16,313.48) ; U16.5@2193.93,152.3 v1@2212.98,152.3
  L3 w3.5: v1(1323.72,45.79) 1324.88,45.79 1336.27,34.4 1419.6,34.4 1425.2,40 1512.69,40 1529.69,23 1578.04,23 1589.54,34.5 1854.9,34.5 1877.07,56.67 1877.07,81.07 1896,100 2090.2,100 2141.55,151.35 v1(2213.93,151.35)
  L5 w3.5: v1(1894.16,313.48) 1922.42,341.74 1922.42,387.62 2065.76,530.96 2153.74,530.96 2161,523.7 v1(2186.66,523.7)
  L10 w3.5: v1(1894.16,313.48) 1950.73,313.48 1976.74,287.47 2111.8,287.47 2191.7,207.57 2191.7,171.72 2212.07,151.35 v1(2213.93,151.35)
  BOTTOM w3.5: v1(2186.66,523.7) 2204.83,523.7 2224.13,543 T26.1@2231,543 ; T26.1@2220.73,540.8 T26.1@2221,540.8
  BOTTOM w5: U15.4@1264.77,44.52 1322.45,44.52 v1(1323.72,45.79) ; R71.2@2146.29,163.07 2153.79,155.57 2206.73,155.57 2210.95,151.35 v1(2213.93,151.35)
I2CSDA_33: R27.2 R60.2 U10.D10 U15.5 U18.5 | length 2204.7
  TOP w5: v1(1048.67,499.22) U10.D10@1064.42,483.47 ; R27.2@1380.43,825.45 1398.45,825.45 v1(1399,826) ; U18.5@2041.63,152.03 2052.06,152.03 v1(2055.02,149.07)
  L3 w3.5: v1(1098.64,45.79) 1111.66,45.79 1138.29,72.42 1311.45,72.42 1324.88,85.85 1395.06,85.85 1410.91,70 1411.18,70 1421.18,60 1520,60 1540,40 1570.36,40 1581.86,51.5 1804.3,51.5 1859.8,107 1875.24,107 1899.64,131.4 2020.6,131.4 2038.27,149.07 v1(2055.02,149.07)
  L5 w3.5: v1(1048.67,499.22) 1072.89,523.44 1116.43,523.44 1140.12,547.13 1276.23,547.13 1336.42,607.32 1336.42,763.42 v1(1399,826)
  L10 w3.5: v1(1048.67,499.22) 1049.87,498.02 1061.92,498.02 1074.47,485.47 1093.67,485.47 1125.41,453.73 1125.41,245.55 1132.37,238.6 1132.37,55 1123.16,45.79 v1(1098.64,45.79)
INCK: P2.13 T25.1 U1.B15 | length 639.7
  TOP w5: U1.B15@1855.77,198.32 v1(1868.57,185.53) ; P2.13@2161,429.13 2186.66,429.13 v1(2186.66,429.21)
  L5 w3.5: v1(1868.57,185.53) 1881.41,172.69 1899.44,172.69 1937.8,134.32 2065.32,134.32 2141.29,210.29 2141.29,383.84 v1(2186.66,429.21)
  BOTTOM w3.5: T25.1@2154.8,432.66 2156.53,430.93 2184.07,430.93 v1@2186,429
LED_B: R100.1 U1.H16 | length 1297
  TOP w5: R100.1@511.92,73 512.21,72.71 528.09,72.71 v1(528.38,72.42) ; U1.H16@1702.23,172.73 v1(1715.02,159.94)
  L3 w3.5: v1(904.5,129.16) 921.41,112.25 1280.05,112.25 1314.5,146.7 1320,152.2 1338.2,152.2 1394.19,152.2 1406.8,139.6 1424.8,121.6 1636.06,121.6 1649.46,135 1690.09,135 v1(1715.02,159.94)
  L10 w3.5: v1(528.38,72.42) 548.03,92.07 867.42,92.07 v1(904.5,129.16)
LED_G: R99.1 U1.H15 | length 1252.1
  TOP w5: U1.H15@1702.23,198.32 v1(1715.02,185.53)
  L3 w3.5: v1(898.5,158.76) 919.88,158.76 925.44,153.2 1306,153.2 1315.6,162.8 1338.2,162.8 1405.06,162.8 1420.67,147.19 1649.05,147.19 1674.55,172.69 1702.18,172.69 v1(1715.02,185.53)
  L10 w3.5: v1(528.34,99.42) 530.42,99.42 537,106 851.68,106 896.1,150.43
LED_R: R98.1 U1.G15 | length 1272.2
  TOP w5: R98.1@512.12,127.29 512.41,127 528.29,127 v1(528.58,126.71) ; v1(1715.02,211.12) U1.G15@1727.82,198.32
  L3 w3.5: v1(911,185.26) 928.08,185.26 947.34,166 1304.41,166 1311.09,172.69 1338.2,172.69 1406.8,172.69 1648.96,172.69 1674.55,198.28 1702.18,198.28 v1(1715.02,211.12)
  L10 w3.5: v1(528.58,126.71) 823.48,126.71 882.03,185.26 v1(911,185.26)
MIPI_D1_N: P2.34 U1.F1 | length 651.7
  TOP w4.2: U1.F1@1753.41,556.59 v1(1766.21,569.39) ; P2.34@2041.92,677.17 2071.02,677.17 ccw(c2071.02,697.45) v1(2091.3,697.45)
  L10 w3.6: 1763.27,588.03 1760.75,585.5 ccw(c1765.67,580.58) 1758.71,580.58 ccw(c1765.67,580.58) 1760.75,575.66 1765.63,570.78 cw(c1764.24,569.39) v1(1766.21,569.39) ; 1763.28,588.03 cw(c1772.87,578.43) 1772.87,592 1986.21,592 ccw(c1986.21,618.37) 2012.57,618.37 2012.57,625.47 ccw(c1997.67,625.47) 1997.67,640.37 1997.34,640.37 cw(c1997.34,644.67) 1997.34,648.97 2016.87,648.97 ccw(c2016.87,663.87) 2016.87,678.77 cw(c2016.87,683.07) 2012.57,683.07 2012.57,701.97 2012.57,713.98 cw(c2023.77,713.98) 2017.12,722.98 cw(c2023.77,713.98) 2018.92,724.07 2023.77,725.17 2027.52,725.17 2029.67,723.02 2029.67,711.25 2031.82,709.1 2036.12,709.1 2038.27,711.25 2038.27,723.02 2040.42,725.17 2047.74,725.17 cw(c2047.74,722.56) 2049.58,724.41 2056.93,717.06 ccw(c2064.41,724.58) 2061,714.54 ccw(c2064.41,724.58) 2064.41,713.98 2082.65,713.98 cw(c2082.65,697.59) 2094.24,709.18 cw(c2083.9,701.97) 2096.5,701.97 cw(c2091.98,701.97) 2091.98,697.45 v1(2091.3,697.45)
MIPI_D1_P: P2.35 U1.G1 | length 651.3
  TOP w4.2: U1.G1@1727.82,556.59 v1(1740.61,569.39) ; v1(2112.3,697.45) ccw(c2120.78,697.45) 2120.78,688.98 P2.35@2161,688.98
  L10 w3.6: v1(1740.61,569.39) cw(c1742.58,569.39) 1741.19,570.78 1744.52,574.1 ccw(c1735.85,582.77) 1748.11,582.77 cw(c1760.37,582.77) 1751.7,591.44 1756.41,596.16 1757.94,597.68 cw(c1768,587.66) 1758.02,597.76 cw(c1768,587.66) 1763.76,601.21 cw(c1772.87,572.07) 1772.87,602.6 1986.21,602.6 ccw(c1986.21,618.37) 2001.97,618.37 2001.97,625.47 ccw(c1997.67,625.47) 1997.67,629.77 1997.34,629.77 cw(c1997.34,644.67) 1997.34,659.57 2016.87,659.57 ccw(c2016.87,663.87) 2016.87,668.17 cw(c2016.87,683.07) 2001.97,683.07 2001.97,701.97 2001.97,713.98 cw(c2023.77,713.98) 2023.77,735.77 2047.8,735.77 cw(c2047.8,722.69) 2057.04,731.94 2064.41,724.58 2087.76,724.58 cw(c2087.76,709.85) 2089.62,724.46 cw(c2087.76,709.85) 2098.18,720.26 cw(c2083.9,701.97) 2107.1,701.97 ccw(c2111.62,701.97) 2111.62,697.45 v1(2112.3,697.45)
MIPI_D2_N: P2.28 U1.E3 | length 650.9
  TOP w3.6: P2.28@2041.92,606.3 cw(c2043.41,604.81) 2043.41,606.92 P2.28@2055.76,606.92
  TOP w4.2: U1.E3@1779,505.41 v1(1791.8,518.21) ; P2.28@2055.76,606.92 ccw(c2055.76,638.83) 2078.32,616.26 v1(2091.76,629.7)
  L10 w3.6: v1(1791.8,518.21) 1812.88,539.29 1836.63,539.29 1848.58,527.34 1848.58,516.01 1861.19,503.41 1879.27,503.41 1887.48,511.62 1906.46,511.62 1937.78,480.3 1962.97,480.3 ccw(c1962.97,484.6) 1967.27,484.6 1967.27,508.33 cw(c1982.17,508.33) 1997.07,508.33 1997.07,474.46 ccw(c2001.37,474.46) 2005.67,474.46 2005.67,497.28 cw(c2020.57,497.28) 2035.47,497.28 ccw(c2039.77,497.28) 2042.82,494.25 ; 2042.83,494.26 2050.14,501.57 ; 2050.16,501.59 ccw(c2036,515.71) 2056,515.71 2056,570.3 cw(c2095.32,570.3) 2067.52,598.11 2086.74,617.34 ccw(c2080.47,623.61) 2089.35,623.61 2089.35,624.18 cw(c2096.85,624.18) 2091.54,629.49 v1(2091.76,629.7)
MIPI_D2_P: P2.29 U1.D3 | length 652.1
  TOP w3.6: v1(2107.21,615.48) cw(c2110.39,612.3) v1@2110.39,616.79 ; P2.29@2157.82,616.79 ccw(c2157.82,621.29) P2.29@2161,618.11
  TOP w4.2: U1.D3@1804.59,505.41 v1(1817.39,518.21) ; v1@2110.39,616.79 P2.29@2157.82,616.79
  L10 w3.6: v1(1817.39,518.21) 1819.76,520.58 1819.76,525.58 1822.87,528.69 1832.24,528.69 1837.98,522.95 1837.98,511.62 1856.8,492.81 1883.66,492.81 1891.87,501.02 1902.07,501.02 1933.39,469.7 1962.97,469.7 ccw(c1962.97,484.6) 1977.87,484.6 1977.87,508.33 cw(c1982.17,508.33) 1986.47,508.33 1986.47,474.46 ccw(c2001.37,474.46) 2016.27,474.46 2016.27,497.28 cw(c2020.57,497.28) 2024.87,497.28 ccw(c2039.77,497.28) 2050.3,486.74 2059.33,495.77 cw(c2062.55,494.15) 2059.73,496.4 ccw(c2036.77,515.08) 2066.38,515.08 ; 2066.59,515.08 ccw(c2036,515.71) 2066.6,515.71 2066.6,527.11 2069,529.51 2078.37,529.51 2080.77,531.91 2080.77,536.71 2078.37,539.11 2069,539.11 2066.6,541.51 2066.6,548.89 2066.6,570.21 cw(c2095.56,570.21) 2075.07,590.67 2094.24,609.84 cw(c2100.52,603.56) 2100.52,612.44 2101.09,612.44 ccw(c2101.09,619.95) 2106.1,614.36 ccw(c2103.68,617.02) 2106.27,614.53 2106.55,614.82 cw(c2109.17,612.34) 2106.6,614.87 v1(2107.21,615.48)
MIPI_D3_N: P2.37 U1.H2 | length 651.2
  TOP w3.6: P2.37@2140.74,712.6 P2.37@2161,712.6
  TOP w4.2: U1.H2@1702.23,531 v1(1715.02,543.8) ; v1(2112,741.34) ccw(c2140.74,741.34) P2.37@2140.74,712.6
  L10 w3.6: v1(1715.02,543.8) cw(c1722.33,551.1) 1712,551.1 1712,561.49 cw(c1746.57,561.49) 1718.66,581.88 1719.85,583.07 ccw(c1713.87,589.05) 1721.38,585.16 ccw(c1713.87,589.05) 1722.17,587.44 ; 1722.33,589.05 cw(c1713.87,589.05) 1722.17,587.44 ; v1(2112,741.34) ccw(c2087,741.34) 2087,766.34 2024.73,766.34 2018.33,766.34 cw(c2016.64,769.52) 2017.12,765.95 ccw(c2024.13,705.8) 1963.81,711.18 cw(c1960.23,711.52) 1963.57,710.19 1963.57,705.91 ccw(c2024.13,705.8) 1963.57,705.8 1963.57,668.1 cw(c1921.07,668.1) 1921.07,625.6 1766.04,625.6 ccw(c1766.04,591.04) 1741.6,615.48 1729.25,603.12 ccw(c1746.44,585.93) 1722.17,587.44
MIPI_D3_P: P2.38 U1.G2 | length 650
  TOP w4.2: U1.G2@1727.82,531 v1(1740.61,543.8) ; P2.38@2041.92,724.41 2074.07,724.41 ccw(c2074.07,741.34) v1(2091,741.34)
  L10 w3.6: v1@1740.42,543.8 v1(1740.61,543.8) 1729.39,555.02 cw(c1740.82,566.45) 1724.66,566.45 cw(c1741.6,566.45) 1729.62,578.43 ccw(c1722.12,585.93) 1732.72,585.93 cw(c1746.44,585.93) 1736.74,595.63 1749.1,607.98 cw(c1766.04,591.04) 1766.04,615 1925.46,615 ccw(c1925.46,663.71) 1974.17,663.71 1974.17,705.8 cw(c2024.13,705.8) 2002.62,750.89 cw(c2024.13,705.8) 2004.42,751.71 2016.64,755.19 2022.72,755.74 2025.55,755.74 2027.52,755.64 2027.53,755.74 2040.61,755.74 2043.01,753.34 2043.01,748.04 2045.41,745.64 2050.21,745.64 2052.61,748.04 2052.61,753.34 2055.01,755.74 2059.81,755.74 2062.21,753.34 2062.21,741.35 2064.61,738.95 2069.41,738.95 2071.81,741.35 2071.81,753.34 2074.21,755.74 2076.01,755.74 2080.19,755.74 cw(c2080.19,744.93) 2091,744.93 v1(2091,741.34)
MIPI_D4_N: P2.25 U1.E4 | length 651.3
  TOP w3.6: P2.25@2150.04,570.87 P2.25@2161,570.87
  TOP w4.2: U1.E4@1779,479.82 v1(1791.8,492.61) ; v1(2126.35,594.56) ccw(c2150.04,594.56) P2.25@2150.04,570.87
  L10 w3.6: v1(1791.8,492.61) 1805.41,479 1831.4,479 1843.37,467.02 1873.98,467.02 1910.13,430.87 1983.34,430.87 2010.65,430.87 cw(c2010.65,426.07) 2015.45,426.07 2015.45,393.67 ccw(c2030.85,393.67) 2046.25,393.67 2046.25,426.07 cw(c2051.05,426.07) 2051.05,430.87 2071.81,430.87 2079.63,430.87 ccw(c2079.63,452.48) 2094.91,437.19 2101.23,443.51 ccw(c2086.21,458.53) 2107.45,458.53 2107.45,529.12 cw(c2130.83,529.12) 2114.3,545.66 ccw(c2097.77,562.19) 2121.15,562.19 2121.15,582.58 cw(c2130.02,582.58) 2123.75,588.85 2124.15,589.26 ccw(c2118.84,594.56) v1(2126.35,594.56)
MIPI_D4_P: P2.26 U1.D4 | length 651.1
  TOP w4.2: U1.D4@1804.59,479.82 v1(1817.39,492.61) ; P2.26@2041.92,582.68 2093.46,582.68 ccw(c2093.46,594.56) v1(2105.35,594.56)
  L10 w3.6: v1(1817.39,492.61) 1832.77,492.61 1847.76,477.62 1878.37,477.62 1914.53,441.47 1983.34,441.47 2010.65,441.47 cw(c2010.65,426.07) 2026.05,426.07 2026.05,393.67 ccw(c2030.85,393.67) 2035.65,393.67 2035.65,426.07 cw(c2051.05,426.07) 2051.05,441.47 2071.81,441.47 2075.24,441.47 ccw(c2075.24,463.08) 2090.52,447.79 2093.69,450.96 ccw(c2086.05,458.6) 2096.85,458.6 2096.85,464.4 2096.85,467.73 2096.85,469.53 2094.45,471.93 2084.01,471.93 2081.61,474.33 2081.61,479.13 2084.01,481.53 2094.45,481.53 2096.85,483.93 2096.85,503.41 2096.85,523.7 2096.85,533.51 cw(c2120.23,533.51) 2103.7,550.05 ccw(c2087.17,566.58) 2110.55,566.58 2110.55,582.58 ccw(c2101.67,582.58) 2107.95,588.85 2107.54,589.25 cw(c2112.85,594.56) v1(2105.35,594.56)
MIPI_DCK_A_N: P2.31 U1.G3 | length 646.9
  TOP w4.2: U1.G3@1727.82,505.41 v1(1740.61,518.21) ; v1(2112.3,654) ccw(c2124.57,654) 2124.57,641.73 P2.31@2161,641.73
  L10 w3.6: v1(1740.61,518.21) 1740.79,518.21 1752.76,530.18 cw(c1758.5,524.42) 1758.5,532.55 ccw(c1758.5,540.69) 1764.23,534.91 ; 1764.26,534.94 1771.44,542.12 cw(c1784.74,528.81) 1784.74,547.63 ccw(c1784.74,566.44) 1798.03,553.13 1813.76,568.86 cw(c1833.73,549) 1813.88,568.97 cw(c1833.73,549) 1818.22,572.5 cw(c1833.73,549) 1833.73,577.16 1912.59,577.16 cw(c1912.59,560.09) 1929.67,560.09 1929.67,523.29 ccw(c1937.47,523.29) 1945.27,523.29 1945.27,560.09 cw(c1962.34,560.09) 1962.34,577.16 2002.62,577.16 ccw(c2002.62,619.94) 2045.4,619.94 2045.4,649.39 cw(c2073.18,649.39) 2073.18,677.17 2081.16,677.17 cw(c2081.16,657.9) 2094.78,671.52 v1(2112.3,654)